# Allegro board CC1310LAUNCHPAD1.brd
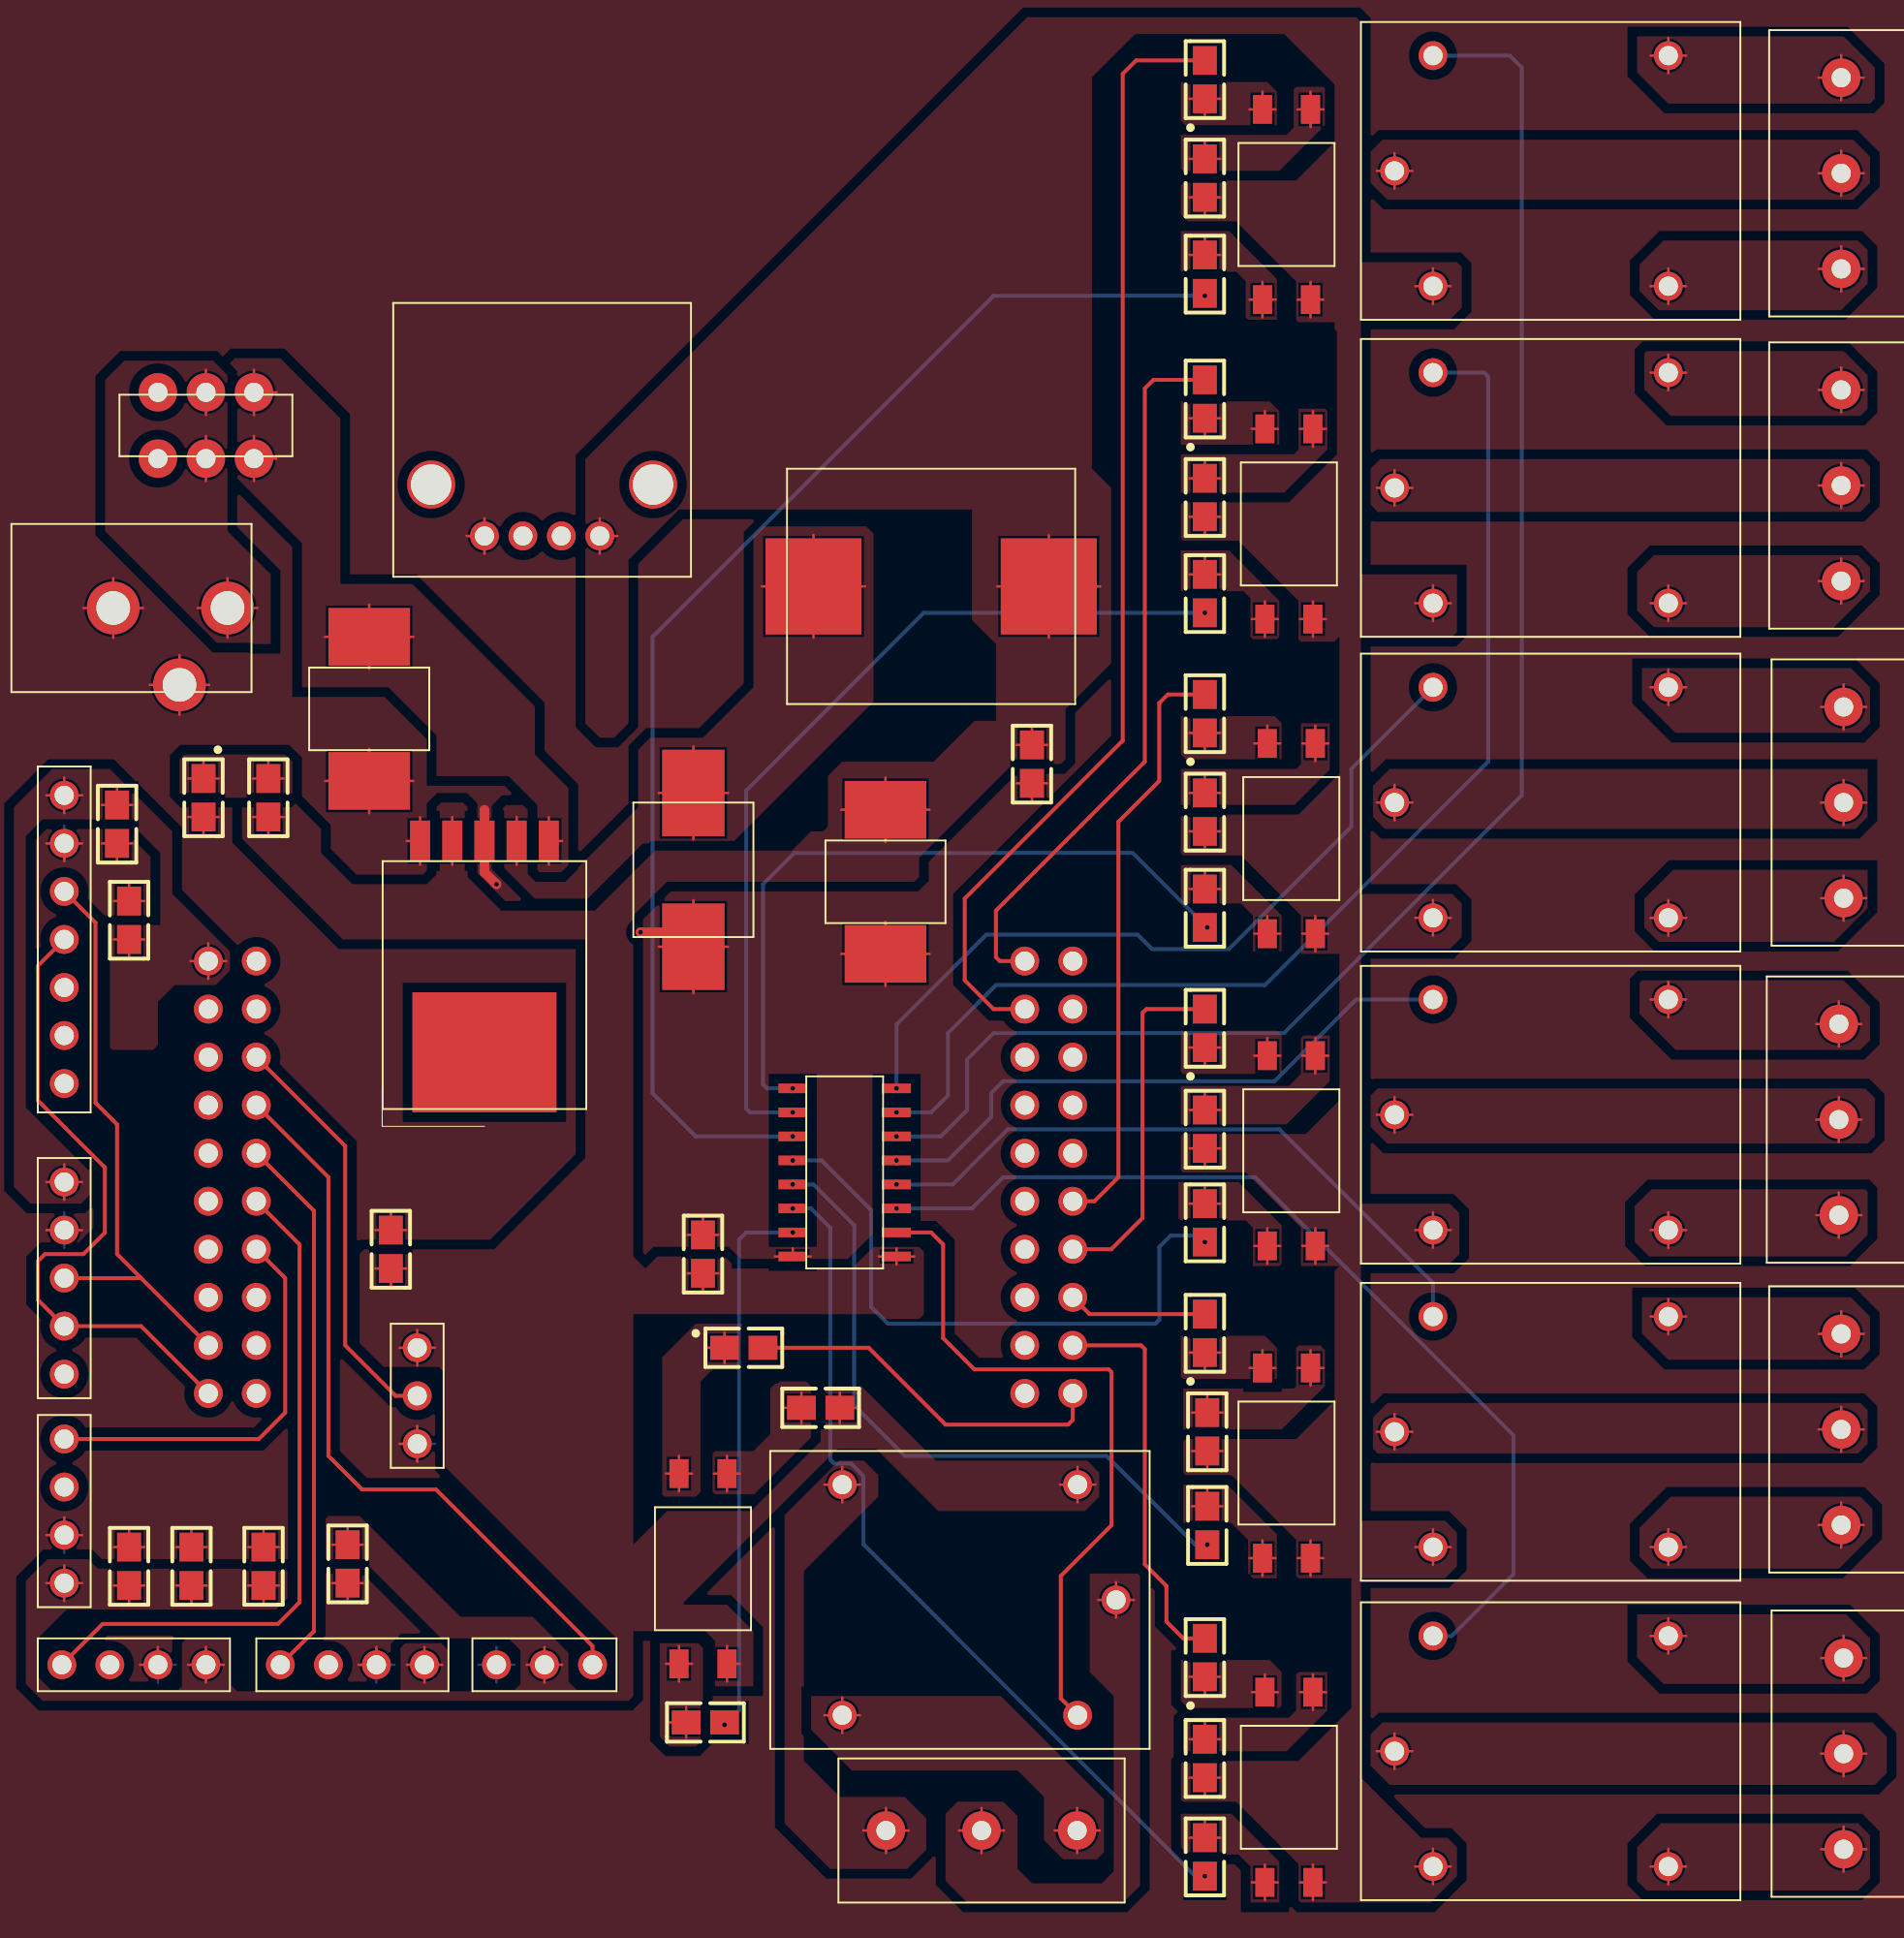
[diagram p0: board, top side]
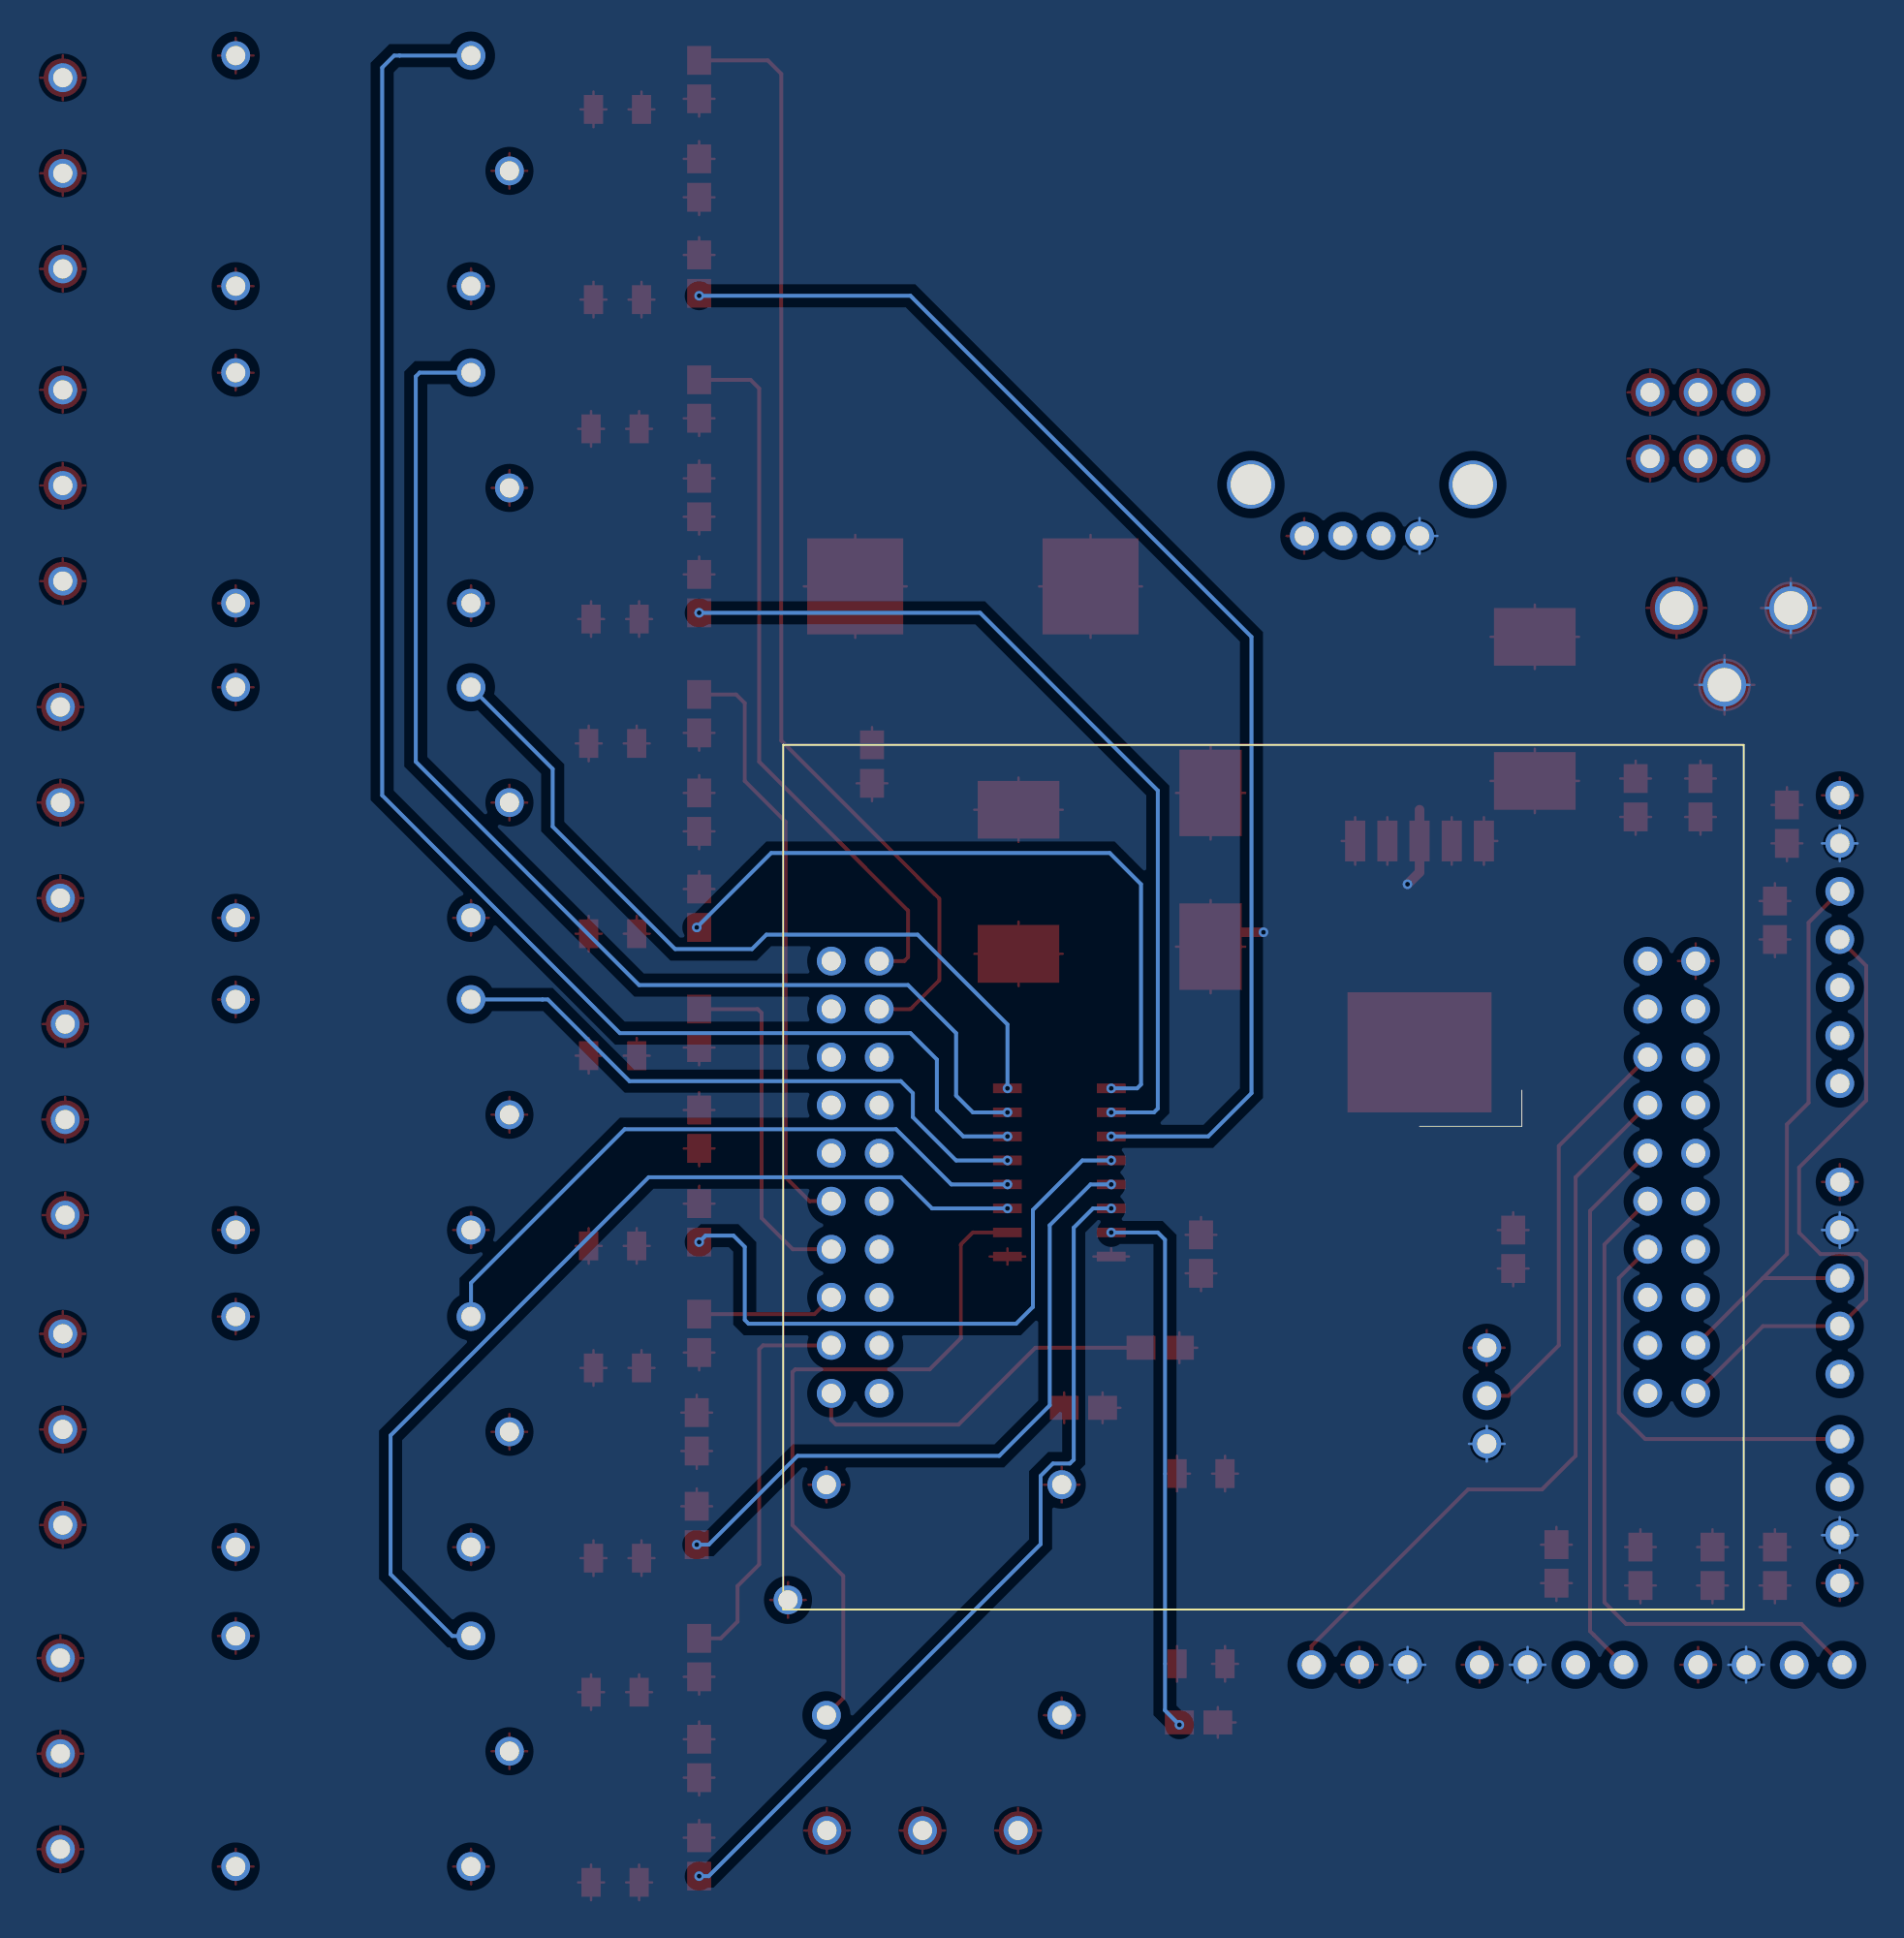
[diagram p1: board, bottom side, seen from below]

Outline 5.41 x 1.91 mm; copper layers: TOP, BOTTOM. Coordinates in mm from the lower left corner of the outline.

## Placement (name value [footprint] x y rotation side)
C1  0.1uF  [C0805]  -1.83 -23.14 180 top
C2  0.1uF  [C0805]  -14.02 15.98 180 top
C3  10uF  [C0805]  34.37 19.15 0 top
C4  0.1uF  [C0805]  -13.39 10.9 180 top
C5  0.1uF  [C0805]  -13.39 -23.27 180 top
C6  0.1uF  [C0805]  16.97 -6.76 0 top
C8  100uF  [C2312]  -0.69 22.07 270 top
C9  100uF  [C2312]  26.62 12.93 270 top
C10  0.1uF  [C0805]  -10.08 -23.27 180 top
C11  0.1uF  [C0805]  0.46 -6.5 180 top
C12  0.1uF  [C0805]  -6.27 -23.27 180 top
D1  LED  [D0805]  43.51 21.82 0 top
D5  LED  [D0805]  -9.45 17.37 180 top
D6  MBR360  [SS34]  16.46 13.56 90 top
D11  LED  [D0805]  43.51 5.18 0 top
D12  LED  [D0805]  43.51 -10.95 0 top
D13  LED  [D0805]  43.51 -28.09 0 top
D14  LED  [D0805]  19.13 -11.71 270 top
D15  LED  [D0805]  43.51 38.46 0 top
D16  LED  [D0805]  43.51 55.35 0 top
J4  HEADER 3  [KF3013P]  77.29 17.12 0 top
J5  HEADER 3  [KF3013P]  77.17 33.88 0 top
J6  HEADER 3  [KF3013P]  77.17 50.39 0 top
J7  HEADER 3  [KF3013P]  77.04 0.36 0 top
J8  HEADER 3  [KF3013P]  77.17 -16.03 0 top
J10  HEADER 3  [KF3013P]  31.7 -37.24 270 top
J11  HEADER 3  [KF3013P]  77.29 -33.17 0 top
L1  47uH  [RH127]  29.03 28.55 0 top
LS1  RELAY SPDT  [HK33F]  61.8 17.12 180 top
LS2  RELAY SPDT  [HK33F]  61.8 33.76 180 top
LS3  RELAY SPDT  [HK33F]  61.8 50.52 180 top
LS4  RELAY SPDT  [HK33F]  61.8 -16.15 180 top
LS5  RELAY SPDT  [HK33F]  61.8 0.61 180 top
LS6  RELAY SPDT  [HK33F]  30.56 -25.04 0 top
LS7  RELAY SPDT  [HK33F]  61.8 -33.05 180 top
R5  220 Ohm  [R0805]  -6.02 17.37 180 top
R12  1k Ohm  [R0805]  43.51 16.61 180 top
R13  1k Ohm  [R0805]  43.51 -0.15 180 top
R14  1k Ohm  [R0805]  43.64 -16.15 180 top
R15  1k Ohm  [R0805]  43.51 -33.43 180 top
R16  1k Ohm  [R0805]  23.19 -14.88 270 top
R17  1k Ohm  [R0805]  43.51 33.25 180 top
R18  1k Ohm  [R0805]  43.51 50.14 180 top
R20  1k Ohm  [R0805]  43.51 11.53 0 top
R21  1k Ohm  [R0805]  43.51 -5.11 0 top
R22  1k Ohm  [R0805]  43.64 -21.11 0 top
R23  1k Ohm  [R0805]  43.51 -38.63 0 top
R24  1k Ohm  [R0805]  17.09 -31.52 90 top
R25  1k Ohm  [R0805]  43.51 28.17 0 top
R26  1k Ohm  [R0805]  43.51 45.06 0 top
U7  -  [ULN2003A]  24.46 -2.44 0 top
U9  bh1750  [BH1750]  -16.81 -8.03 0 top
U10  -  [LM393]  -16.81 -20.35 180 top
U11  pH  [PH]  8.59 -28.47 90 top
U12  CC1310LauchPad  [CC1310CONNECTOR]  13.67 -2.69 180 bottom
U13  LM2576HV-ADJ  [LM2576]  5.41 7.47 90 top
U14  -  [LM393]  -13.13 -28.47 270 top
U15  -  [LM35]  1.85 -14.25 0 top
U16  -  [LM393]  -1.57 -28.47 270 top
U17  DC  [DC002POWER]  -13.26 27.41 0 top
U18  USB  [USBFEMALE]  8.46 36.3 90 top
U21  PC817XxNiP0F  [PC817X2NIP0F]  48.08 15.21 270 top
U22  PC817XxNiP0F  [PC817X2NIP0F]  48.08 -1.3 270 top
U23  PC817XxNiP0F  [PC817X2NIP0F]  47.83 -17.81 270 top
U24  PC817XxNiP0F  [PC817X2NIP0F]  47.96 -34.95 270 top
U25  PC817XxNiP0F  [PC817X2NIP0F]  16.97 -23.39 270 top
U26  PC817XxNiP0F  [PC817X2NIP0F]  47.96 31.85 270 top
U27  PC817XxNiP0F  [PC817X2NIP0F]  47.83 48.74 270 top
U28  -  [MSS-22D18]  -9.32 37.06 90 top
U29  -  [HDC100X]  -16.81 9.88 0 top

## Library data of the parts
C1-C6 C10-C12 = CAP NP
C8 C9 = CAP POL
D1 D5 D11-D16 = LED
D6 = DIODE SCHOTTKY
J4-J8 J10 J11 = HEADER 3
L1 = INDUCTOR
LS1-LS7 = RELAY SPDT
R5 R12-R18 R20-R26 = RESISTOR
U7 = ULN2003A
U9 = bh1750
U10 U14 U16 = LM393
U11 = pH
U12 = CC1310LaouchPad
U13 = LM2576HV-ADJ
U15 = LM35
U17 = DC002
U18 = USB
U21-U27 = PC817XxNiP0F
U28 = MSS-22D18
U29 = HDC100X

## Footprints (pads in the part's own frame, mm; a bottom-side part is the same pattern mirrored in y, then rotated)
BH1750
  round 1.524 hole 1.016: 1(0,5.08) 2(0,2.54) 3(0,0) 4(0,-2.54) 5(0,-5.08)
C0805
  rect 1.27x1.524 smd: 1(0,1.016) 2(0,-1.016)
C2312
  rect 3.048x4.318 smd: 1(-3.81,0) 2(3.81,0)
CC1310CONNECTOR
  round 1.524 hole 1.016: 1(22.86,11.43) 2(22.86,8.89) 3(22.86,6.35) 4(22.86,3.81) 5(22.86,1.27) 6(22.86,-1.27) 7(22.86,-3.81) 8(22.86,-6.35) 9(22.86,-8.89) 10(22.86,-11.43) 11(-22.86,-11.43) 12(-22.86,-8.89) 13(-22.86,-6.35) 14(-22.86,-3.81) 15(-22.86,-1.27) 16(-22.86,1.27) 17(-22.86,3.81) 18(-22.86,6.35) 19(-22.86,8.89) 20(-22.86,11.43) 21(20.32,11.43) 22(20.32,8.89) 23(20.32,6.35) 24(20.32,3.81) 25(20.32,1.27) 26(20.32,-1.27) 27(20.32,-3.81) 28(20.32,-6.35) 29(20.32,-8.89) 30(20.32,-11.43) 31(-20.32,-11.43) 32(-20.32,-8.89) 33(-20.32,-6.35) 34(-20.32,-3.81) 35(-20.32,-1.27) 36(-20.32,1.27) 37(-20.32,3.81) 38(-20.32,6.35) 39(-20.32,8.89) 40(-20.32,11.43)
D0805
  rect 1.27x1.524 smd: 1(0,1.016) 2(0,-1.016)
DC002POWER
  round 2.794 hole 1.778: 3(-0.965,0) 4(5.08,0) 5(2.54,-4.064)
HDC100X
  round 1.524 hole 1.016: 1(0,-7.62) 2(0,-5.08) 3(0,-2.54) 4(0,0) 5(0,2.54) 6(0,5.08) 7(0,7.62)
HK33F
  round 1.524 hole 1.016: 1(6.223,6.096) 2(6.223,-6.096) 3(8.255,0) 4(-6.223,6.096) 5(-6.223,-6.096)
KF3013P
  round 2.032 hole 1.016: 1(0,5.055) 2(0,0) 3(0,-5.055)
LM35
  round 1.524 hole 1.016: 1(0,2.54) 2(0,0) 3(0,-2.54)
LM393
  round 1.524 hole 1.016: 1(0,3.81) 2(0,1.27) 3(0,-1.27) 4(0,-3.81)
LM2576
  rect 6.35x7.62 smd: (-3.556,0)
  rect 2.159x1.067 smd: 1(7.62,-3.404) 2(7.62,-1.702) 3(7.62,0) 4(7.62,1.702) 5(7.62,3.404)
MSS-22D18
  round 2.032 hole 1.016: 1(-1.753,2.54) 2(-1.753,0) 3(-1.753,-2.54) 4(1.753,-2.54) 5(1.753,0) 6(1.753,2.54)
PC817X2NIP0F
  rect 1.524x1.016 smd: 1(-5.029,1.27) 2(-5.029,-1.27) 3(5.029,-1.27) 4(5.029,1.27)
PH
  round 1.524 hole 1.016: 1(0,2.54) 2(0,0) 3(0,-2.54)
R0805
  rect 1.27x1.524 smd: 1(0,1.016) 2(0,-1.016)
RH127
  rect 5.08x5.08 smd: 1(-6.223,0) 2(6.223,0)
SS34
  rect 4.572x3.302 smd: 1(-4.064,0) 2(4.064,0)
ULN2003A
  rect 1.524x0.508 smd: 1(-2.743,4.445) 2(-2.743,3.175) 3(-2.743,1.905) 4(-2.743,0.635) 5(-2.743,-0.635) 6(-2.743,-1.905) 7(-2.743,-3.175) 8(-2.743,-4.445) 9(2.743,-4.445) 10(2.743,-3.175) 11(2.743,-1.905) 12(2.743,-0.635) 13(2.743,0.635) 14(2.743,1.905) 15(2.743,3.175) 16(2.743,4.445)
USBFEMALE
  round 2.54 hole 2.134: (-2.362,5.867) (-2.362,-5.867)
  round 1.524 hole 1.016: 1(-5.08,-3.048) 2(-5.08,-1.016) 3(-5.08,1.016) 4(-5.08,3.048)

## Nets
3V3: C2.2 C4.1 U9.1(VCC) U12.1(3V3) U29.7(VIN)
5V: C1.2 C3.1 C5.1 C6.2 C9.1 C10.1 C11.1 C12.1 L1.2 LS1.1(COIL1) LS2.1(COIL1) LS3.1(COIL1) LS4.1(COIL1) LS5.1(COIL1) LS6.1(COIL1) LS7.1(COIL1) R5.1 R12.1 R13.1 R14.1 R15.1 R16.1 R17.1 R18.1 U7.9(COM) U10.1(VCC) U11.2(VCC) U13.4(FEEDBACK) U14.1(VCC) U15.1(VCC) U16.1(VCC) U18.1(VCC) U21.4(EMITTER) U22.4(EMITTER) U23.4(EMITTER) U24.4(EMITTER) U25.4(EMITTER) U26.4(EMITTER) U27.4(EMITTER)
GND: C1.1 C2.1 C3.2 C4.2 C5.2 C6.1 C8.2 C9.2 C10.2 C11.2 C12.2 D5.1(CATHODE) D6.1(ANODE) U7.8(E) U9.2(GND) U10.2(GND) U11.1(GND) U13.3(GND) U13.5(ON/OFF) U14.2(GND) U15.3(GND) U16.2(GND) U17.3(GND1) U17.5(GND2) U18.4(GND) U29.6(GND)
A: U12.21(5V)
N45592: C8.1 U13.1(VIN) U28.3(C1) U28.4(C2)
N45672: D6.2(CATHODE) L1.1 U13.2(OUTPUT)
N45788: U9.3(SCL) U12.9(DIO4 / I2C SCL) U29.5(SCL)
N45822: U9.4(SDA) U12.10(DIO5 / I2C SDA) U29.4(SDA)
N45888: U12.25(DIO27 / A4) U16.4(AO)
N45956: LS2.2(COIL2) U7.15(2C)
N45960: LS3.2(COIL2) U7.14(3C)
N46040: LS7.2(COIL2) U7.11(6C)
N46052: LS6.2(COIL2) U7.10(7C)
N46056: J11.2 LS7.3(COMMON)
N46086: J11.1 LS7.5(NC)
N46098: J11.3 LS7.4(NO)
N46172: LS4.2(COIL2) U7.12(5C)
N46276: LS5.2(COIL2) U7.13(4C)
N47108: U12.23(DIO25 / A2) U15.2(OUT)
N47294: J4.2 LS1.3(COMMON)
N47328: J4.1 LS1.5(NC)
N47344: J4.3 LS1.4(NO)
N47364: J5.2 LS2.3(COMMON)
N47376: J5.1 LS2.5(NC)
N47410: J5.3 LS2.4(NO)
N47434: J6.2 LS3.3(COMMON)
N47472: J6.1 LS3.5(NC)
N47484: J6.3 LS3.4(NO)
N47508: J7.2 LS5.3(COMMON)
N47520: J7.1 LS5.5(NC)
N47550: J7.3 LS5.4(NO)
N47574: J8.2 LS4.3(COMMON)
N47604: J8.1 LS4.5(NC)
N47616: J8.3 LS4.4(NO)
N47728: J10.2 LS6.3(COMMON)
N47740: J10.1 LS6.5(NC)
N47770: J10.3 LS6.4(NO)
N59569: U12.26(DIO28 / A5) U14.4(AO)
N60071: U11.3(AO) U12.24(DIO26 / A3)
N63732: U10.4(AO) U12.27(DIO29 / A6)
N64930: LS1.2(COIL2) U7.16(1C)
N72485: R12.2 U21.1(ANODE)
N72769: R13.2 U22.1(ANODE)
N73065: R14.2 U23.1(ANODE)
N73365: R15.2 U24.1(ANODE)
N73669: R16.2 U25.1(ANODE)
N74807: D1.1(CATHODE) U12.15(DIO9 / MOSI)
N74854: D11.1(CATHODE) U12.14(DIO8 / MISO)
N74907: D12.1(CATHODE) U12.13(DIO13 / BTN1)
N74952: D13.1(CATHODE) U12.12(DIO14 / BTN2)
N74990: D14.2(ANODE) U25.2(CATHODE)
N74994: D14.1(CATHODE) U12.11(DIO15)
N75036: D15.1(CATHODE) U12.40(DIO7 / GRN LED)
N75078: D16.1(CATHODE) U12.39(DIO8 / RED LED)
N76545: R20.1 U21.3(COLLECTOR)
N76560: R21.1 U22.3(COLLECTOR)
N76587: R22.1 U23.3(COLLECTOR)
N76621: R23.1 U24.3(COLLECTOR)
N76655: R24.1 U25.3(COLLECTOR)
N87792: D1.2(ANODE) U21.2(CATHODE)
N88579: D11.2(ANODE) U22.2(CATHODE)
N89000: D12.2(ANODE) U23.2(CATHODE)
N89401: D13.2(ANODE) U24.2(CATHODE)
N90793: R17.2 U26.1(ANODE)
N91085: D15.2(ANODE) U26.2(CATHODE)
N91216: R25.1 U26.3(COLLECTOR)
N91679: R18.2 U27.1(ANODE)
N91683: D16.2(ANODE) U27.2(CATHODE)
N91836: R26.1 U27.3(COLLECTOR)
N91946: R26.2 U7.3(3B)
N91982: R20.2 U7.1(1B)
N92026: R21.2 U7.4(4B)
N92057: R25.2 U7.2(2B)
N93563: R23.2 U7.6(6B)
N93742: R24.2 U7.7(7B)
N95463: U17.4(VCC) U28.2(B1) U28.5(B2)
N101467: R22.2 U7.5(5B)
N478560: D5.2(ANODE) R5.2

Pads without a net: U9 5; U10 3; U12 2 3 4 5 6 7 8 16 17 18 19 20 22 28 29 30 31 32 33 34 35 36 37 38; U14 3; U16 3; U18 2 3; U28 1 6; U29 1 2 3

## Via types
v1: diameter 0.508, hole 0.254, TOP to BOTTOM, 22 vias

## Routing (per net, layer and track width the routed paths; a pad name or vN(x,y) marks a point on that pad's centre or on a via; arc(x,y) is an arc through that point)
3V3: length 16.4
  TOP w0.127: -10.14,8.74 U12.1 ; U12.1 -9.19,9.68 ; U12.1 -9.19,7.8 ; U12.1 -8.25,8.74 ; -16.81,16.56 U29.7 ; U29.7 -15.87,17.5 ; U29.7 -16.81,18.44 ; U29.7 -17.76,17.5 ; -14.2,9.88 -13.39,9.88 ; -13.39,9.88 -12.57,9.88 ; -13.39,9.88 -13.39,8.94 ; C2.2 -14.02,17.93 ; C2.2 -13.21,16.99 ; C2.2 -14.83,16.99 ; U9.1 -15.87,-2.95 ; U9.1 -16.81,-3.89 ; U9.1 -17.76,-2.95 ; U9.1 -16.81,-2.01
5V: length 132.8
  TOP w0.127: U18.1 11.51,32.16 ; U18.1 11.51,30.28 ; U18.1 12.45,31.22 ; 42.7,15.6 R12.1 ; R12.1 43.51,14.66 ; R12.1 44.32,15.6 ; -10.26,-28.47 U14.1 ; U14.1 -8.38,-28.47 ; U14.1 -9.32,-29.41 ; U14.1 -9.32,-27.53 ; -17.76,-24.16 U10.1 ; U10.1 -16.81,-23.22 ; U10.1 -16.81,-25.1 ; U10.1 -15.87,-24.16 ; -7.09,-24.28 C12.1 ; C12.1 -5.46,-24.28 ; C12.1 -6.27,-25.22 ; 49.23,25.88 U26.4 ; U26.4 49.23,27.76 ; U26.4 49.91,26.82 ; U26.4 48.54,26.82 ; C10.1 -9.27,-24.28 ; C10.1 -10.9,-24.28 ; C10.1 -10.08,-25.22 ; 54.63,-5.49 LS5.1 ; LS5.1 55.58,-4.55 ; LS5.1 56.52,-5.49 ; LS5.1 55.58,-6.43 ; U16.1 3.18,-28.47 ; U16.1 2.24,-27.53 ; U16.1 2.24,-29.41 ; U16.1 1.29,-28.47 ; 55.58,-40.08 LS7.1 ; LS7.1 56.52,-39.14 ; LS7.1 55.58,-38.2 ; LS7.1 54.63,-39.14 ; 54.63,44.42 LS3.1 ; LS3.1 55.58,43.48 ; LS3.1 55.58,45.36 ; LS3.1 56.52,44.42 ; 55.58,10.08 LS1.1 ; LS1.1 54.63,11.02 ; LS1.1 56.52,11.02 ; LS1.1 55.58,11.96 ; 35.26,25.83 L1.2 ; L1.2 37.97,28.55 ; L1.2 35.26,31.27 ; L1.2 32.54,28.55 ; 43.51,32.23 44.32,32.23 ; 43.51,32.23 43.51,31.29 ; 43.51,32.23 42.7,32.23 ; 35.84,-18.95 LS6.1 ; LS6.1 37.72,-18.95 ; LS6.1 36.78,-19.89 ; LS6.1 36.78,-18.01 ; C3.1 35.18,20.17 ; C3.1 33.55,20.17 ; C3.1 34.37,21.11 ; C5.1 -12.57,-24.28 ; C5.1 -14.2,-24.28 ; C5.1 -13.39,-25.22 ; R5.1 -5.21,16.36 ; R5.1 -6.83,16.36 ; R5.1 -6.02,15.42 ; 54.63,27.66 LS2.1 ; LS2.1 55.58,26.72 ; LS2.1 55.58,28.6 ; LS2.1 56.52,27.66 ; C6.2 17.78,-7.77 ; C6.2 16.97,-8.71 ; C6.2 16.15,-7.77 ; U11.2 8.59,-27.53 ; U11.2 8.59,-29.41 ; U11.2 7.64,-28.47 ; U11.2 9.53,-28.47 ; 1.85,-11.71 1.85,-10.77 ; 1.85,-11.71 0.91,-11.71 ; 1.85,-11.71 1.85,-12.65 ; 1.85,-11.71 2.79,-11.71 ; C9.1 26.62,18.44 ; C9.1 26.62,15.04 ; C9.1 28.96,16.74 ; C9.1 24.28,16.74 ; 55.58,-23.19 LS4.1 ; LS4.1 55.58,-21.31 ; LS4.1 56.52,-22.25 ; LS4.1 54.63,-22.25 ; 48.54,-39.98 U24.4 ; U24.4 49.23,-40.92 ; U24.4 49.23,-39.04 ; U24.4 49.91,-39.98 ; 27.2,-7.32 U7.9 ; U7.9 27.2,-6.45 ; U7.9 28.14,-6.88 ; U7.9 26.26,-6.88 ; 49.35,-7.26 U22.4 ; U22.4 50.04,-6.32 ; U22.4 49.35,-5.38 ; U22.4 48.67,-6.32 ; 18.24,-29.36 U25.4 ; U25.4 18.24,-27.48 ; U25.4 18.92,-28.42 ; 49.1,-23.77 U23.4 ; U23.4 48.41,-22.83 ; U23.4 49.1,-21.89 ; U23.4 49.78,-22.83 ; -0.36,-7.52 C11.1 ; C11.1 1.27,-7.52 ; C11.1 0.46,-8.46 ; 3.71,13.83 U13.4 3.71,16.35 ; R15.1 44.32,-34.44 ; R15.1 42.7,-34.44 ; R15.1 43.51,-35.38 ; R14.1 44.45,-17.17 ; R14.1 42.82,-17.17 ; R14.1 43.64,-18.11 ; 42.7,49.12 R18.1 ; R18.1 44.32,49.12 ; R18.1 43.51,48.18 ; U27.4 49.1,44.65 ; U27.4 48.41,43.71 ; U27.4 49.1,42.77 ; U27.4 49.78,43.71 ; 48.67,10.19 U21.4 ; U21.4 50.04,10.19 ; U21.4 49.35,11.13 ; U21.4 49.35,9.25 ; 24.21,-14.88 24.21,-14.07 ; 24.21,-14.88 24.21,-15.7 ; 24.21,-14.88 25.15,-14.88 ; 42.7,-1.17 R13.1 ; R13.1 43.51,-2.11 ; R13.1 44.32,-1.17 ; C1.2 -1.02,-22.12 ; C1.2 -2.64,-22.12 ; C1.2 -1.83,-21.18
GND: length 132.5
  TOP w0.127: U17.3 -14.22,28.98 ; U17.3 -12.65,27.41 ; U17.3 -15.8,27.41 ; U17.3 -14.22,25.83 ; 1.85,-17.73 U15.3 ; U15.3 1.85,-15.85 ; U15.3 0.91,-16.79 ; U7.8 21.72,-6.45 ; U7.8 20.78,-6.88 ; U7.8 22.66,-6.88 ; C10.2 -9.27,-22.25 ; C10.2 -10.08,-21.31 ; C10.2 -10.9,-22.25 ; 16.46,7.04 D6.1 ; D6.1 18.29,9.5 ; D6.1 16.46,11.96 ; D6.1 14.63,9.5 ; U17.5 -10.72,24.92 ; U17.5 -12.29,23.34 ; U17.5 -10.72,21.77 ; U17.5 -9.14,23.34 ; 16.15,-5.74 C6.1 ; C6.1 16.97,-4.8 ; C6.1 17.78,-5.74 ; -1.83,-25.1 C1.1 ; C1.1 -1.02,-24.16 ; C1.1 -2.64,-24.16 ; 24.28,9.12 C9.2 ; C9.2 26.62,7.42 ; C9.2 26.62,10.82 ; C9.2 28.96,9.12 ; C8.2 -0.69,19.96 ; C8.2 -3.02,18.26 ; C8.2 1.65,18.26 ; C8.2 -0.69,16.56 ; 5.41,30.28 U18.4 ; U18.4 4.47,31.22 ; U18.4 5.41,32.16 ; C11.2 1.27,-5.49 ; C11.2 0.46,-4.55 ; C11.2 -0.36,-5.49 ; -12.8,-28.47 U14.2 -11.86,-27.53 ; -7.09,-22.25 C12.2 ; C12.2 -6.27,-21.31 ; C12.2 -5.46,-22.25 ; -17.76,-5.49 U9.2 -15.87,-5.49 ; -17.76,14.96 U29.6 ; U29.6 -16.81,14.02 ; U29.6 -15.87,14.96 ; -9.45,15.42 D5.1 ; D5.1 -8.64,16.36 ; D5.1 -10.26,16.36 ; -17.76,-21.62 U10.2 ; U10.2 -15.87,-21.62 ; U10.2 -16.81,-20.68 ; -14.2,-22.25 C5.2 ; C5.2 -13.39,-21.31 ; C5.2 -12.57,-22.25 ; U13.5 2.01,16.35 ; U13.5 2.01,13.83 ; U13.5 1.29,15.09 ; C3.2 35.18,18.14 ; C3.2 33.55,18.14 ; C3.2 34.37,17.2 ; -14.83,14.96 C2.1 ; C2.1 -13.21,14.96 ; C2.1 -14.02,14.02 ; -1.25,-28.47 U16.2 -0.3,-27.53 ; -14.2,11.91 C4.2 ; C4.2 -13.39,12.85 ; C4.2 -12.57,11.91
  TOP w0.508: v1(13.67,10.26) 15.7,10.26 D6.1 ; v1(6.05,12.8) 5.41,13.44 U13.3 5.41,16.74
  BOTTOM w0.127: U18.4 5.41,32.16 ; U18.4 4.47,31.22 ; U18.4 5.41,30.28 ; U17.5 -10.72,24.66 ; U17.5 -10.72,22.02 ; U17.5 -9.4,23.34 ; U17.5 -12.04,23.34 ; -15.55,27.41 U17.3 ; U17.3 -14.22,26.09 ; U17.3 -14.22,28.73 ; U17.3 -12.9,27.41 ; 0.91,-16.79 U15.3 ; U15.3 1.85,-15.85 ; U15.3 2.79,-16.79 ; U15.3 1.85,-17.73 ; U10.2 -15.87,-21.62 ; U10.2 -16.81,-20.68 ; U10.2 -17.76,-21.62 ; U10.2 -16.81,-22.56 ; U16.2 0.64,-28.47 ; U16.2 -1.25,-28.47 ; U16.2 -0.3,-27.53 ; U16.2 -0.3,-29.41 ; 6.05,-29.41 U11.1 ; U11.1 6.99,-28.47 ; U11.1 6.05,-27.53 ; U11.1 5.1,-28.47 ; U14.2 -11.86,-27.53 ; U14.2 -10.92,-28.47 ; U14.2 -11.86,-29.41 ; U14.2 -12.8,-28.47 ; U29.6 -15.87,14.96 ; U29.6 -16.81,15.9 ; U29.6 -16.81,14.02 ; U29.6 -17.76,14.96 ; -17.76,-5.49 U9.2 ; U9.2 -16.81,-4.55 ; U9.2 -16.81,-6.43 ; U9.2 -15.87,-5.49
N45592: length 18.5
  TOP w0.127: -6.78,34.11 -6.78,35.31 ; -6.78,35.31 -5.59,35.31 ; -6.78,35.31 -6.78,36.5 ; U13.1 9.53,15.09 ; U13.1 8.81,13.83 ; U13.1 8.81,16.35 ; -6.78,38.81 -6.78,40.01 ; -6.78,38.81 -6.78,37.62 ; -6.78,38.81 -5.59,38.81 ; C8.1 1.65,25.88 ; C8.1 -0.69,24.18 ; C8.1 -0.69,27.58 ; C8.1 -3.02,25.88
N45672: length 22
  TOP w0.127: 16.46,15.16 D6.2 ; D6.2 14.63,17.63 ; D6.2 16.46,20.09 ; D6.2 18.29,17.63 ; 22.81,25.83 L1.1 ; L1.1 25.53,28.55 ; L1.1 22.81,31.27 ; L1.1 20.09,28.55 ; 7.11,13.83 U13.2 7.11,16.35
N45788: length 31.2
  TOP w0.203: -12.75,-8.03 -14.02,-6.76 -14.02,0.1 -15.16,1.24 -15.16,10.77 U29.5 ; -12.75,-8.03 U9.3 ; -12.75,-8.03 U12.9
N45822: length 34.8
  TOP w0.203: U29.4 -18.21,8.48 -18.21,1.37 -14.66,-2.18 -14.66,-5.62 -15.8,-6.76 -17.83,-6.76 -18.21,-7.14 -18.21,-9.17 U9.4 -12.75,-10.57 U12.10
N45888: length 29.1
  TOP w0.203: U12.25 -3.61,-4.47 -3.61,-26.7 -3.81,-26.9 U16.4
N45956: length 64.3
  BOTTOM w0.203: v1(27.2,0.74) 29.03,0.74 29.92,1.63 29.92,4.93 32.46,7.47 46.68,7.47 58.5,19.28 58.5,39.65 58.29,39.85 LS2.2
N45960: length 85.5
  BOTTOM w0.203: v1(27.2,-0.53) 29.54,-0.53 30.94,0.86 30.94,3.53 32.33,4.93 47.7,4.93 60.27,17.5 60.27,55.98 59.64,56.62 59.35,56.62 59.35,56.62 LS3.2
N46040: length 51.9
  BOTTOM w0.203: LS7.2 56.57,-26.95 59.83,-23.69 59.83,-16.34 46.18,-2.69 32.84,-2.69 31.19,-4.34 v1(27.2,-4.34)
N46052: length 37
  TOP w0.203: LS6.2 35.89,-30.25 35.89,-23.77 38.57,-21.09 38.57,-13 38.43,-12.85 31.32,-12.85 29.67,-11.2 29.67,-6.25 29.03,-5.61 U7.10
N46056: length 8.5
  TOP w0.127: 76.1,-33.17 J11.2 ; J11.2 77.29,-31.98 ; J11.2 77.29,-34.37 ; J11.2 78.49,-33.17 ; LS7.3 53.54,-32.11 ; LS7.3 54.48,-33.05 ; LS7.3 52.6,-33.05 ; LS7.3 53.54,-33.99
N46086: length 8.5
  TOP w0.127: 67.08,-26.95 LS7.5 ; LS7.5 68.02,-27.89 ; LS7.5 68.96,-26.95 ; LS7.5 68.02,-26.01 ; 76.1,-28.12 J11.1 ; J11.1 78.49,-28.12 ; J11.1 77.29,-26.92 ; J11.1 77.29,-29.31
N46098: length 8.5
  TOP w0.127: 77.29,-39.42 J11.3 ; J11.3 77.29,-37.03 ; J11.3 76.1,-38.23 ; J11.3 78.49,-38.23 ; 68.02,-40.08 LS7.4 ; LS7.4 68.96,-39.14 ; LS7.4 67.08,-39.14 ; LS7.4 68.02,-38.2
N46172: length 34.7
  BOTTOM w0.203: v1(27.2,-3.07) 30.18,-3.07 33.1,-0.15 47.45,-0.15 55.58,-8.28 LS4.2
N46276: length 32.6
  BOTTOM w0.203: v1(27.2,-1.8) 29.92,-1.8 32.21,0.48 32.21,1.75 32.84,2.39 47.19,2.39 51.51,6.71 51.8,6.71 LS5.2
N47108: length 22.1
  TOP w0.203: U15.2 0.71,-14.25 -1.96,-11.58 -1.96,-1.04 U12.23
N47294: length 8.5
  TOP w0.127: J4.2 78.49,17.12 ; J4.2 76.1,17.12 ; J4.2 77.29,15.93 ; J4.2 77.29,18.31 ; LS1.3 54.48,17.12 ; LS1.3 53.54,18.06 ; LS1.3 52.6,17.12 ; LS1.3 53.54,16.18
N47328: length 8.5
  TOP w0.127: 68.02,22.28 LS1.5 ; LS1.5 68.02,24.16 ; LS1.5 67.08,23.22 ; LS1.5 68.96,23.22 ; 77.29,20.98 J4.1 ; J4.1 77.29,23.37 ; J4.1 78.49,22.17 ; J4.1 76.1,22.17
N47344: length 8.5
  TOP w0.127: 77.29,10.87 J4.3 ; J4.3 78.49,12.06 ; J4.3 76.1,12.06 ; J4.3 77.29,13.26 ; 68.02,10.08 LS1.4 ; LS1.4 68.02,11.96 ; LS1.4 68.96,11.02 ; LS1.4 67.08,11.02
N47364: length 8.5
  TOP w0.127: LS2.3 53.54,34.7 ; LS2.3 54.48,33.76 ; LS2.3 52.6,33.76 ; LS2.3 53.54,32.82 ; 77.17,32.69 J5.2 ; J5.2 75.97,33.88 ; J5.2 78.36,33.88 ; J5.2 77.17,35.08
N47376: length 8.5
  TOP w0.127: J5.1 77.17,40.13 ; J5.1 78.36,38.94 ; J5.1 75.97,38.94 ; J5.1 77.17,37.74 ; LS2.5 68.96,39.85 ; LS2.5 68.02,38.91 ; LS2.5 67.08,39.85 ; LS2.5 68.02,40.79
N47410: length 8.5
  TOP w0.127: 67.08,27.66 LS2.4 ; LS2.4 68.02,28.6 ; LS2.4 68.96,27.66 ; LS2.4 68.02,26.72 ; 77.17,27.63 J5.3 ; J5.3 77.17,30.02 ; J5.3 75.97,28.83 ; J5.3 78.36,28.83
N47434: length 8.5
  TOP w0.127: 52.6,50.52 LS3.3 ; LS3.3 53.54,49.58 ; LS3.3 54.48,50.52 ; LS3.3 53.54,51.46 ; J6.2 77.17,51.59 ; J6.2 77.17,49.2 ; J6.2 78.36,50.39 ; J6.2 75.97,50.39
N47472: length 8.5
  TOP w0.127: LS3.5 68.96,56.62 ; LS3.5 67.08,56.62 ; LS3.5 68.02,55.68 ; LS3.5 68.02,57.56 ; J6.1 77.17,56.64 ; J6.1 77.17,54.25 ; J6.1 75.97,55.45 ; J6.1 78.36,55.45
N47484: length 8.5
  TOP w0.127: 75.97,45.34 J6.3 ; J6.3 77.17,46.53 ; J6.3 78.36,45.34 ; J6.3 77.17,44.14 ; 67.08,44.42 LS3.4 ; LS3.4 68.96,44.42 ; LS3.4 68.02,45.36 ; LS3.4 68.02,43.48
N47508: length 8.5
  TOP w0.127: 52.6,0.61 LS5.3 ; LS5.3 54.48,0.61 ; LS5.3 53.54,-0.33 ; LS5.3 53.54,1.55 ; J7.2 77.04,1.55 ; J7.2 78.23,0.36 ; J7.2 75.84,0.36 ; J7.2 77.04,-0.84
N47520: length 8.5
  TOP w0.127: 77.04,4.22 J7.1 ; J7.1 77.04,6.6 ; J7.1 78.23,5.41 ; J7.1 75.84,5.41 ; LS5.5 68.02,7.65 ; LS5.5 67.08,6.71 ; LS5.5 68.96,6.71 ; LS5.5 68.02,5.77
N47550: length 8.5
  TOP w0.127: LS5.4 68.96,-5.49 ; LS5.4 67.08,-5.49 ; LS5.4 68.02,-6.43 ; LS5.4 68.02,-4.55 ; J7.3 77.04,-3.5 ; J7.3 75.84,-4.7 ; J7.3 77.04,-5.89 ; J7.3 78.23,-4.7
N47574: length 8.5
  TOP w0.127: LS4.3 54.48,-16.15 ; LS4.3 52.6,-16.15 ; LS4.3 53.54,-15.21 ; LS4.3 53.54,-17.09 ; 77.17,-17.22 J8.2 ; J8.2 75.97,-16.03 ; J8.2 78.36,-16.03 ; J8.2 77.17,-14.83
N47604: length 8.5
  TOP w0.127: LS4.5 68.96,-10.06 ; LS4.5 68.02,-11 ; LS4.5 67.08,-10.06 ; LS4.5 68.02,-9.12 ; J8.1 77.17,-9.78 ; J8.1 75.97,-10.97 ; J8.1 78.36,-10.97 ; J8.1 77.17,-12.17
N47616: length 8.5
  TOP w0.127: LS4.4 68.96,-22.25 ; LS4.4 68.02,-21.31 ; LS4.4 68.02,-23.19 ; LS4.4 67.08,-22.25 ; 77.17,-22.28 J8.3 ; J8.3 78.36,-21.08 ; J8.3 77.17,-19.89 ; J8.3 75.97,-21.08
N47728: length 8.5
  TOP w0.127: J10.2 32.89,-37.24 ; J10.2 31.7,-38.43 ; J10.2 30.5,-37.24 ; J10.2 31.7,-36.04 ; 38.81,-25.98 LS6.3 ; LS6.3 39.75,-25.04 ; LS6.3 38.81,-24.1 ; LS6.3 37.87,-25.04
N47740: length 8.5
  TOP w0.127: LS6.5 25.27,-31.14 ; LS6.5 23.39,-31.14 ; LS6.5 24.33,-30.2 ; LS6.5 24.33,-32.08 ; J10.1 37.95,-37.24 ; J10.1 36.75,-36.04 ; J10.1 36.75,-38.43 ; J10.1 35.56,-37.24
N47770: length 8.5
  TOP w0.127: LS6.4 25.27,-18.95 ; LS6.4 24.33,-19.89 ; LS6.4 24.33,-18.01 ; LS6.4 23.39,-18.95 ; 25.45,-37.24 J10.3 ; J10.3 27.84,-37.24 ; J10.3 26.64,-36.04 ; J10.3 26.64,-38.43
N59569: length 36.1
  TOP w0.203: U14.4 -14.78,-26.31 -5.51,-26.31 -4.37,-25.17 -4.37,-6.25 U12.26
N60071: length 39.2
  TOP w0.203: U12.24 -2.84,-2.69 -2.84,-17.42 -1.07,-19.2 2.84,-19.2 11.13,-27.48 U11.3
N63732: length 21.5
  TOP w0.203: U10.4 -6.53,-16.54 -5.13,-15.14 -5.13,-8.03 U12.27
N64930: length 41.6
  BOTTOM w0.203: v1(27.2,2.01) 27.2,5.38 31.95,10.13 39.95,10.13 40.72,9.37 44.78,9.37 51.26,15.85 51.26,18.9 LS1.2
N72485: length 5.8
  TOP w0.127: U21.1 50.04,20.24 ; U21.1 49.35,19.3 ; U21.1 48.67,20.24 ; U21.1 49.35,21.18 ; 42.7,17.63 R12.2 ; R12.2 43.51,18.57 ; R12.2 44.32,17.63
N72769: length 5.8
  TOP w0.127: U22.1 50.04,3.73 ; U22.1 49.35,2.79 ; U22.1 48.67,3.73 ; U22.1 49.35,4.67 ; R13.2 43.51,1.8 ; R13.2 42.7,0.86 ; R13.2 44.32,0.86
N73065: length 5.8
  TOP w0.127: U23.1 49.78,-12.78 ; U23.1 49.1,-11.84 ; U23.1 48.41,-12.78 ; U23.1 49.1,-13.72 ; R14.2 43.64,-14.2 ; R14.2 44.45,-15.14 ; R14.2 42.82,-15.14
N73365: length 5.8
  TOP w0.127: 42.7,-32.41 R15.2 ; R15.2 44.32,-32.41 ; R15.2 43.51,-31.47 ; 49.23,-30.86 U24.1 ; U24.1 49.91,-29.92 ; U24.1 49.23,-28.98 ; U24.1 48.54,-29.92
N73669: length 5.8
  TOP w0.127: 17.55,-18.36 U25.1 ; U25.1 18.24,-17.42 ; U25.1 18.92,-18.36 ; U25.1 18.24,-19.3 ; R16.2 22.17,-14.07 ; R16.2 22.17,-15.7 ; R16.2 21.23,-14.88
N74807: length 31.5
  TOP w0.203: U12.15 37.67,-3.96 38.94,-2.69 38.94,16.1 41.1,18.26 41.1,22.38 41.55,22.83 D1.1
N74854: length 18.6
  TOP w0.203: U12.14 38.56,-6.5 40.21,-4.85 40.21,5.99 40.41,6.2 D11.1
N74907: length 7.4
  TOP w0.203: U12.13 37.41,-9.93 D12.1
N74952: length 21.2
  TOP w0.203: U12.12 40.13,-11.58 40.34,-11.79 40.34,-23.17 41.48,-24.31 41.48,-26.19 42.37,-27.08 D13.1
N74990: length 5.8
  TOP w0.127: U25.2 16.38,-18.36 ; U25.2 15.7,-19.3 ; U25.2 15.01,-18.36 ; U25.2 15.7,-17.42 ; 18.11,-12.52 D14.2 ; D14.2 18.11,-10.9 ; D14.2 17.17,-11.71
N74994: length 19.6
  TOP w0.203: U12.11 36.53,-15.52 36.27,-15.77 29.79,-15.77 25.73,-11.71 D14.1
N75036: length 38.3
  TOP w0.203: D15.1 40.79,39.47 40.34,39.01 40.34,19.28 32.46,11.4 32.46,8.94 32.66,8.74 U12.40
N75078: length 59.8
  TOP w0.203: U12.39 32.33,6.2 30.81,7.72 30.81,12.04 39.17,20.4 39.17,55.65 39.88,56.36 D16.1
N76545: length 4.9
  TOP w0.127: U21.3 47.5,10.19 ; U21.3 46.13,10.19 ; U21.3 46.81,11.13 ; R20.1 43.51,13.49 ; R20.1 42.7,12.55 ; R20.1 44.32,12.55
N76560: length 5.8
  TOP w0.127: R21.1 44.32,-4.09 ; R21.1 42.7,-4.09 ; R21.1 43.51,-3.15 ; 46.13,-6.32 U22.3 ; U22.3 47.5,-6.32 ; U22.3 46.81,-7.26 ; U22.3 46.81,-5.38
N76587: length 5.8
  TOP w0.127: U23.3 47.24,-22.83 ; U23.3 46.56,-23.77 ; U23.3 45.87,-22.83 ; U23.3 46.56,-21.89 ; 42.82,-20.09 R22.1 ; R22.1 43.64,-19.15 ; R22.1 44.45,-20.09
N76621: length 5.8
  TOP w0.127: R23.1 43.51,-36.68 ; R23.1 44.32,-37.62 ; R23.1 42.7,-37.62 ; 46,-39.98 U24.3 ; U24.3 46.69,-39.04 ; U24.3 46.69,-40.92 ; U24.3 47.37,-39.98
N76655: length 5.8
  TOP w0.127: 16.08,-32.33 R24.1 ; R24.1 15.14,-31.52 ; R24.1 16.08,-30.71 ; 15.01,-28.42 U25.3 ; U25.3 15.7,-29.36 ; U25.3 15.7,-27.48 ; U25.3 16.38,-28.42
N87792: length 4.9
  TOP w0.127: U21.2 47.5,20.24 ; U21.2 46.81,21.18 ; U21.2 46.13,20.24 ; 43.51,19.86 D1.2 ; D1.2 42.7,20.8 ; D1.2 44.32,20.8
N88579: length 4.9
  TOP w0.127: U22.2 47.5,3.73 ; U22.2 46.81,4.67 ; U22.2 46.13,3.73 ; 43.51,3.23 D11.2 ; D11.2 44.32,4.17 ; D11.2 42.7,4.17
N89000: length 4.9
  TOP w0.127: U23.2 46.56,-11.84 ; U23.2 47.24,-12.78 ; U23.2 45.87,-12.78 ; 43.51,-12.9 43.51,-11.96 ; 43.51,-11.96 42.7,-11.96 ; 43.51,-11.96 44.32,-11.96
N89401: length 4.9
  TOP w0.127: D13.2 44.32,-29.11 ; D13.2 43.51,-30.05 ; D13.2 42.7,-29.11 ; U24.2 47.37,-29.92 ; U24.2 46.69,-28.98 ; U24.2 46,-29.92
N90793: length 5.8
  TOP w0.127: R17.2 43.51,35.2 ; R17.2 44.32,34.26 ; R17.2 42.7,34.26 ; U26.1 49.23,37.82 ; U26.1 49.91,36.88 ; U26.1 49.23,35.94 ; U26.1 48.54,36.88
N91085: length 4.9
  TOP w0.127: 43.51,36.5 D15.2 ; D15.2 42.7,37.44 ; D15.2 44.32,37.44 ; U26.2 47.37,36.88 ; U26.2 46,36.88 ; U26.2 46.69,37.82
N91216: length 5.8
  TOP w0.127: R25.1 44.32,29.18 ; R25.1 42.7,29.18 ; R25.1 43.51,30.12 ; U26.3 46.69,27.76 ; U26.3 46,26.82 ; U26.3 47.37,26.82 ; U26.3 46.69,25.88
N91679: length 5.8
  TOP w0.127: U27.1 49.78,53.77 ; U27.1 48.41,53.77 ; U27.1 49.1,54.71 ; U27.1 49.1,52.83 ; R18.2 44.32,51.16 ; R18.2 42.7,51.16 ; R18.2 43.51,52.1
N91683: length 4.9
  TOP w0.127: 42.7,54.33 D16.2 ; D16.2 43.51,53.39 ; D16.2 44.32,54.33 ; U27.2 47.24,53.77 ; U27.2 45.87,53.77 ; U27.2 46.56,54.71
N91836: length 5.8
  TOP w0.127: 45.87,43.71 U27.3 ; U27.3 46.56,42.77 ; U27.3 47.24,43.71 ; U27.3 46.56,44.65 ; 42.7,46.08 R26.1 ; R26.1 43.51,47.02 ; R26.1 44.32,46.08
N91946: length 69.2
  BOTTOM w0.203: v1(43.51,43.92) 32.33,43.92 14.3,25.88 14.3,1.75 16.59,-0.53 v1(21.72,-0.53)
N91982: length 38.1
  BOTTOM w0.203: v1(21.72,2.01) 20.35,2.01 20.14,2.21 20.14,12.8 21.79,14.45 39.7,14.45 v1(43.64,10.52)
N92026: length 32.7
  BOTTOM w0.203: v1(21.72,-1.8) 23.24,-1.8 25.86,-4.42 25.86,-9.55 26.75,-10.44 40.89,-10.44 41.1,-10.24 41.1,-6.38 41.69,-5.78 43.17,-5.78 v1(43.51,-6.12)
N92057: length 47.5
  BOTTOM w0.203: v1(43.51,27.15) 28.65,27.15 19.25,17.75 19.25,0.94 19.46,0.74 v1(21.72,0.74)
N93563: length 45.7
  BOTTOM w0.203: v1(43.51,-39.65) 43,-39.65 25.45,-22.1 25.45,-18.49 24.8,-17.83 23.9,-17.83 23.7,-17.63 23.7,-5.36 22.68,-4.34 v1(21.72,-4.34)
N93742: length 29
  BOTTOM w0.203: v1(18.11,-31.65) 18.87,-30.89 18.87,-5.99 19.25,-5.61 v1(21.72,-5.61)
N95463: length 11.1
  TOP w0.127: -9.32,34.11 U28.2 -9.32,36.5 ; -8.18,25.83 U17.4 ; U17.4 -8.18,28.98 ; U17.4 -9.75,27.41 ; U17.4 -6.6,27.41 ; -9.32,37.62 U28.5 -9.32,40.01
N101467: length 35.4
  BOTTOM w0.203: v1(21.72,-3.07) 22.81,-3.07 24.97,-5.23 24.97,-14.76 27.64,-17.42 38.3,-17.42 43,-22.12 v1(43.64,-22.12)
N478560: length 5.1
  TOP w0.127: D5.2 -9.45,19.33 ; D5.2 -8.64,18.39 ; D5.2 -10.26,18.39 ; -6.83,18.39 R5.2 ; R5.2 -6.02,19.33 ; R5.2 -5.21,18.39

## Copper pours and planes (outline as drawn; the poured copper is in the pictures)
3V3 on TOP: -14.4,10.64 -11.73,10.64 -11.73,14.45 -13.51,16.23 -17.96,16.23 -18.85,15.34 -18.85,0.99 -15.54,-2.31 -15.42,-2.31 -15.42,-3.58 -15.93,-4.09 -18.59,-4.09 -19.48,-3.2 -19.48,16.87 -17.45,18.9 -14.4,18.9 -11.1,15.6 -11.1,12.29 -8.05,9.25 -8.05,8.23 -8.81,7.47 -10.97,7.47 -11.86,6.58 -11.86,4.29 -12.12,4.04 -14.27,4.04 -14.4,4.17
5V on TOP: outline of 257 points within -18.85,-41.05 57.1,58.65
GND on TOP: -20.88,60.3 -20.88,-43.33 83.13,-43.33 83.13,60.3 ; 47 cut-outs
GND on BOTTOM: -20.88,60.3 -20.88,-43.33 83.13,-43.33 83.13,60.3 ; 19 cut-outs
N45592 on TOP: -7.8,40.61 -5.38,40.61 -2.21,37.44 -2.21,28.68 1.6,28.68 8.08,22.2 8.08,19.66 9.86,17.88 9.86,13.82 9.47,13.44 8.33,13.44 8.2,13.56 8.2,16.99 6.68,18.52 2.87,18.52 2.87,20.68 0.33,23.22 -4.24,23.22 -4.24,30.84 -8.05,34.65 -8.05,40.36
N45672 on TOP: 6.55,16.99 7.44,16.99 7.82,16.61 7.82,13.56 8.46,12.93 9.6,12.93 13.54,16.87 13.54,19.91 14.17,20.55 16.97,20.55 19.63,23.22 19.63,31.22 20.14,31.72 25.6,31.72 25.98,31.34 25.98,22.45 18.49,14.96 13.79,14.96 10.87,12.04 8.08,12.04 6.3,13.82 6.3,16.74
N46056 on TOP: 52.15,-32.28 52.15,-33.68 53.29,-34.82 78.94,-34.82 79.58,-34.19 79.58,-32.28 78.82,-31.52 52.91,-31.52
N46086 on TOP: 66.37,-25.81 66.37,-28.09 67.77,-29.49 78.31,-29.49 78.69,-29.11 78.69,-27.08 77.42,-25.81
N46098 on TOP: 66.37,-38.13 66.37,-39.9 66.88,-40.41 78.05,-40.41 78.69,-39.78 78.69,-37.49 78.05,-36.86 67.64,-36.86
N47294 on TOP: 78.56,18.9 78.56,16.36 77.93,15.72 53.04,15.72 52.4,16.36 52.4,18.01 53.29,18.9
N47328 on TOP: 66.62,24.23 66.62,22.58 68.4,20.8 78.18,20.8 78.69,21.31 78.69,23.22 77.67,24.23
N47344 on TOP: 66.75,12.04 66.75,10.52 67.51,9.75 76.78,9.75 78.56,11.53 78.56,13.56 68.28,13.56
N47364 on TOP: 52.27,34.77 52.27,32.87 52.65,32.49 78.18,32.49 78.69,32.99 78.69,34.9 78.31,35.28 52.78,35.28
N47376 on TOP: 66.75,40.87 66.75,38.96 68.15,37.57 78.18,37.57 78.56,37.95 78.56,39.73 77.29,41 66.88,41
N47410 on TOP: 66.37,29.31 66.37,27.28 67.26,26.39 76.78,26.39 78.69,28.3 78.69,29.57 78.05,30.2 67.26,30.2
N47434 on TOP: 52.15,51.41 52.15,50.01 53.16,49 77.8,49 78.69,49.89 78.69,51.28 77.8,52.17 52.91,52.17
N47472 on TOP: 66.37,57.63 66.37,55.73 68.02,54.08 78.69,54.08 78.94,54.33 78.94,55.98 77.29,57.63
N47484 on TOP: 66.5,45.57 66.5,44.17 67.51,43.15 77.17,43.15 78.56,44.55 78.56,46.33 78.05,46.84 67.77,46.84
N47508 on TOP: 52.15,1.5 52.15,0.1 53.16,-0.91 78.56,-0.91 78.94,-0.53 78.94,1.5 78.44,2.01 52.65,2.01
N47520 on TOP: 66.5,7.59 66.5,5.94 68.4,4.04 78.18,4.04 78.69,4.55 78.69,6.32 77.29,7.72 66.62,7.72
N47550 on TOP: 66.24,-4.22 66.24,-6.12 67.01,-6.88 77.42,-6.88 78.56,-5.74 78.56,-3.45 78.44,-3.33 67.13,-3.33
N47574 on TOP: 78.18,-14.63 53.16,-14.63 52.4,-15.39 52.4,-17.04 52.65,-17.3 78.05,-17.3 78.56,-16.79 78.56,-15.01
N47604 on TOP: 66.62,-9.04 66.62,-10.95 68.02,-12.34 78.18,-12.34 78.69,-11.84 78.69,-10.06 77.67,-9.04
N47616 on TOP: 66.5,-22.76 67.13,-23.39 77.04,-23.39 78.82,-21.62 78.82,-20.22 78.18,-19.58 68.15,-19.58 66.5,-21.23
N47728 on TOP: 37.41,-23.65 37.41,-28.85 38.68,-30.12 38.68,-39.4 38.05,-40.03 34.37,-40.03 33.6,-39.27 33.6,-36.47 32.84,-35.71 30.43,-35.71 29.79,-36.35 29.79,-39.9 30.94,-41.05 39.19,-41.05 40.08,-40.16 40.08,-23.77 39.95,-23.65
N47740 on TOP: 22.68,-30.12 22.68,-31.9 24.84,-34.06 33.6,-34.06 35,-35.46 35,-37.74 36.02,-38.76 37.8,-38.76 38.43,-38.13 38.43,-35.84 32.72,-30.12
N47770 on TOP: 24.08,-17.68 25.48,-17.68 26.24,-18.44 26.24,-19.58 22.3,-23.52 22.3,-33.55 24.21,-35.46 27.64,-35.46 28.78,-36.6 28.78,-38.25 27.76,-39.27 23.7,-39.27 21.29,-36.86 21.29,-20.47
N72485 on TOP: 42.24,18.9 48.34,18.9 48.59,19.15 48.59,21.31 50.11,21.31 50.11,18.77 48.21,16.87 42.24,16.87
N72769 on TOP: 42.24,2.13 42.24,0.1 42.49,-0.15 47.57,-0.15 50.11,2.39 50.11,4.8 48.72,4.8 48.59,4.67 48.59,2.77 47.96,2.13
N73065 on TOP: 42.37,-13.87 42.37,-16.15 47.45,-16.15 49.86,-13.74 49.86,-11.84 49.61,-11.58 48.46,-11.58 48.34,-11.71 48.34,-13.74 48.21,-13.87
N73365 on TOP: 42.37,-31.39 42.37,-33.3 42.49,-33.43 47.45,-33.43 49.99,-30.89 49.99,-28.85 48.46,-28.85 48.34,-28.98 48.34,-30.89 47.96,-31.27 42.49,-31.27
N73669 on TOP: 20.9,-13.61 20.78,-13.61 20.52,-13.87 20.52,-16.28 19.63,-17.17 17.6,-17.17 17.48,-17.3 17.48,-19.33 17.6,-19.46 19.76,-19.46 22.94,-16.28 22.94,-14 22.43,-13.49 21.03,-13.49
N74990 on TOP: 19.13,-12.85 19.13,-10.57 18.87,-10.31 16.71,-10.31 14.81,-12.22 14.81,-19.46 14.94,-19.58 16.59,-19.58 16.84,-19.33 16.84,-13.49 17.48,-12.85
N76545 on TOP: 42.24,13.94 44.78,13.94 47.57,11.15 47.57,9.25 46.05,9.25 46.05,11.15 45.42,11.79 42.24,11.79
N76560 on TOP: 42.11,-2.82 45.16,-2.82 47.57,-5.23 47.57,-7.26 47.45,-7.39 46.05,-7.39 46.05,-5.36 45.67,-4.98 42.24,-4.98 42.11,-4.85
N76587 on TOP: 42.37,-18.82 44.91,-18.82 47.32,-21.23 47.32,-23.9 46.05,-23.9 45.8,-23.65 45.8,-21.87 44.91,-20.98 42.37,-20.98
N76621 on TOP: 42.24,-36.35 44.91,-36.35 47.45,-38.89 47.45,-41.05 45.92,-41.05 45.92,-39.14 45.29,-38.51 42.62,-38.51 42.24,-38.13
N76655 on TOP: 14.68,-27.33 16.71,-27.33 16.97,-27.58 16.97,-32.41 16.59,-32.79 15.19,-32.79 14.68,-32.28
N87792 on TOP: 42.24,21.69 47.19,21.69 47.57,21.31 47.57,19.28 47.45,19.15 42.75,19.15 42.24,19.66
N88579 on TOP: 42.24,5.05 47.32,5.05 47.57,4.8 47.57,2.9 47.45,2.77 42.37,2.77 42.24,2.9
N89000 on TOP: 42.24,-11.07 46.69,-11.07 47.32,-11.71 47.32,-13.49 47.19,-13.61 42.62,-13.61 42.24,-13.23
N89401 on TOP: 42.24,-28.22 46.94,-28.22 47.57,-28.85 47.57,-30.63 47.32,-30.89 42.75,-30.89 42.24,-30.38
N90793 on TOP: 42.24,35.53 48.21,35.53 48.46,35.79 48.46,37.95 49.86,37.95 49.99,37.82 49.99,35.79 47.57,33.38 42.24,33.38
N91085 on TOP: 42.24,38.33 46.94,38.33 47.45,37.82 47.45,35.92 42.37,35.92 42.24,36.04
N91216 on TOP: 42.24,30.45 44.78,30.45 47.45,27.79 47.45,25.88 47.32,25.76 46.05,25.76 45.92,25.88 45.92,27.91 45.54,28.3 42.24,28.3
N91679 on TOP: 42.24,52.43 42.24,50.65 42.62,50.27 47.19,50.27 49.86,52.93 49.86,54.97 48.34,54.97 48.21,54.84 48.21,52.81 47.83,52.43
N91683 on TOP: 42.24,55.22 46.81,55.22 47.32,54.71 47.32,52.93 47.19,52.81 42.62,52.81 42.24,53.19
N91836 on TOP: 42.24,47.35 44.78,47.35 47.32,44.81 47.32,42.65 45.8,42.65 45.67,42.77 45.67,44.68 45.16,45.19 42.24,45.19
N95463 on TOP: -8.18,39.73 -8.18,31.47 -5.89,29.18 -5.89,25.5 -6.78,25.5 -6.85,25.57 -8.75,25.57 -14.66,31.47 -14.66,39.47 -13.64,40.49 -8.94,40.49
N478560 on TOP: -10.46,19.66 -5.13,19.66 -4.75,19.28 -4.75,17.63 -5,17.37 -10.46,17.37 -10.72,17.63 -10.72,19.41
